# Allegro board board.brd
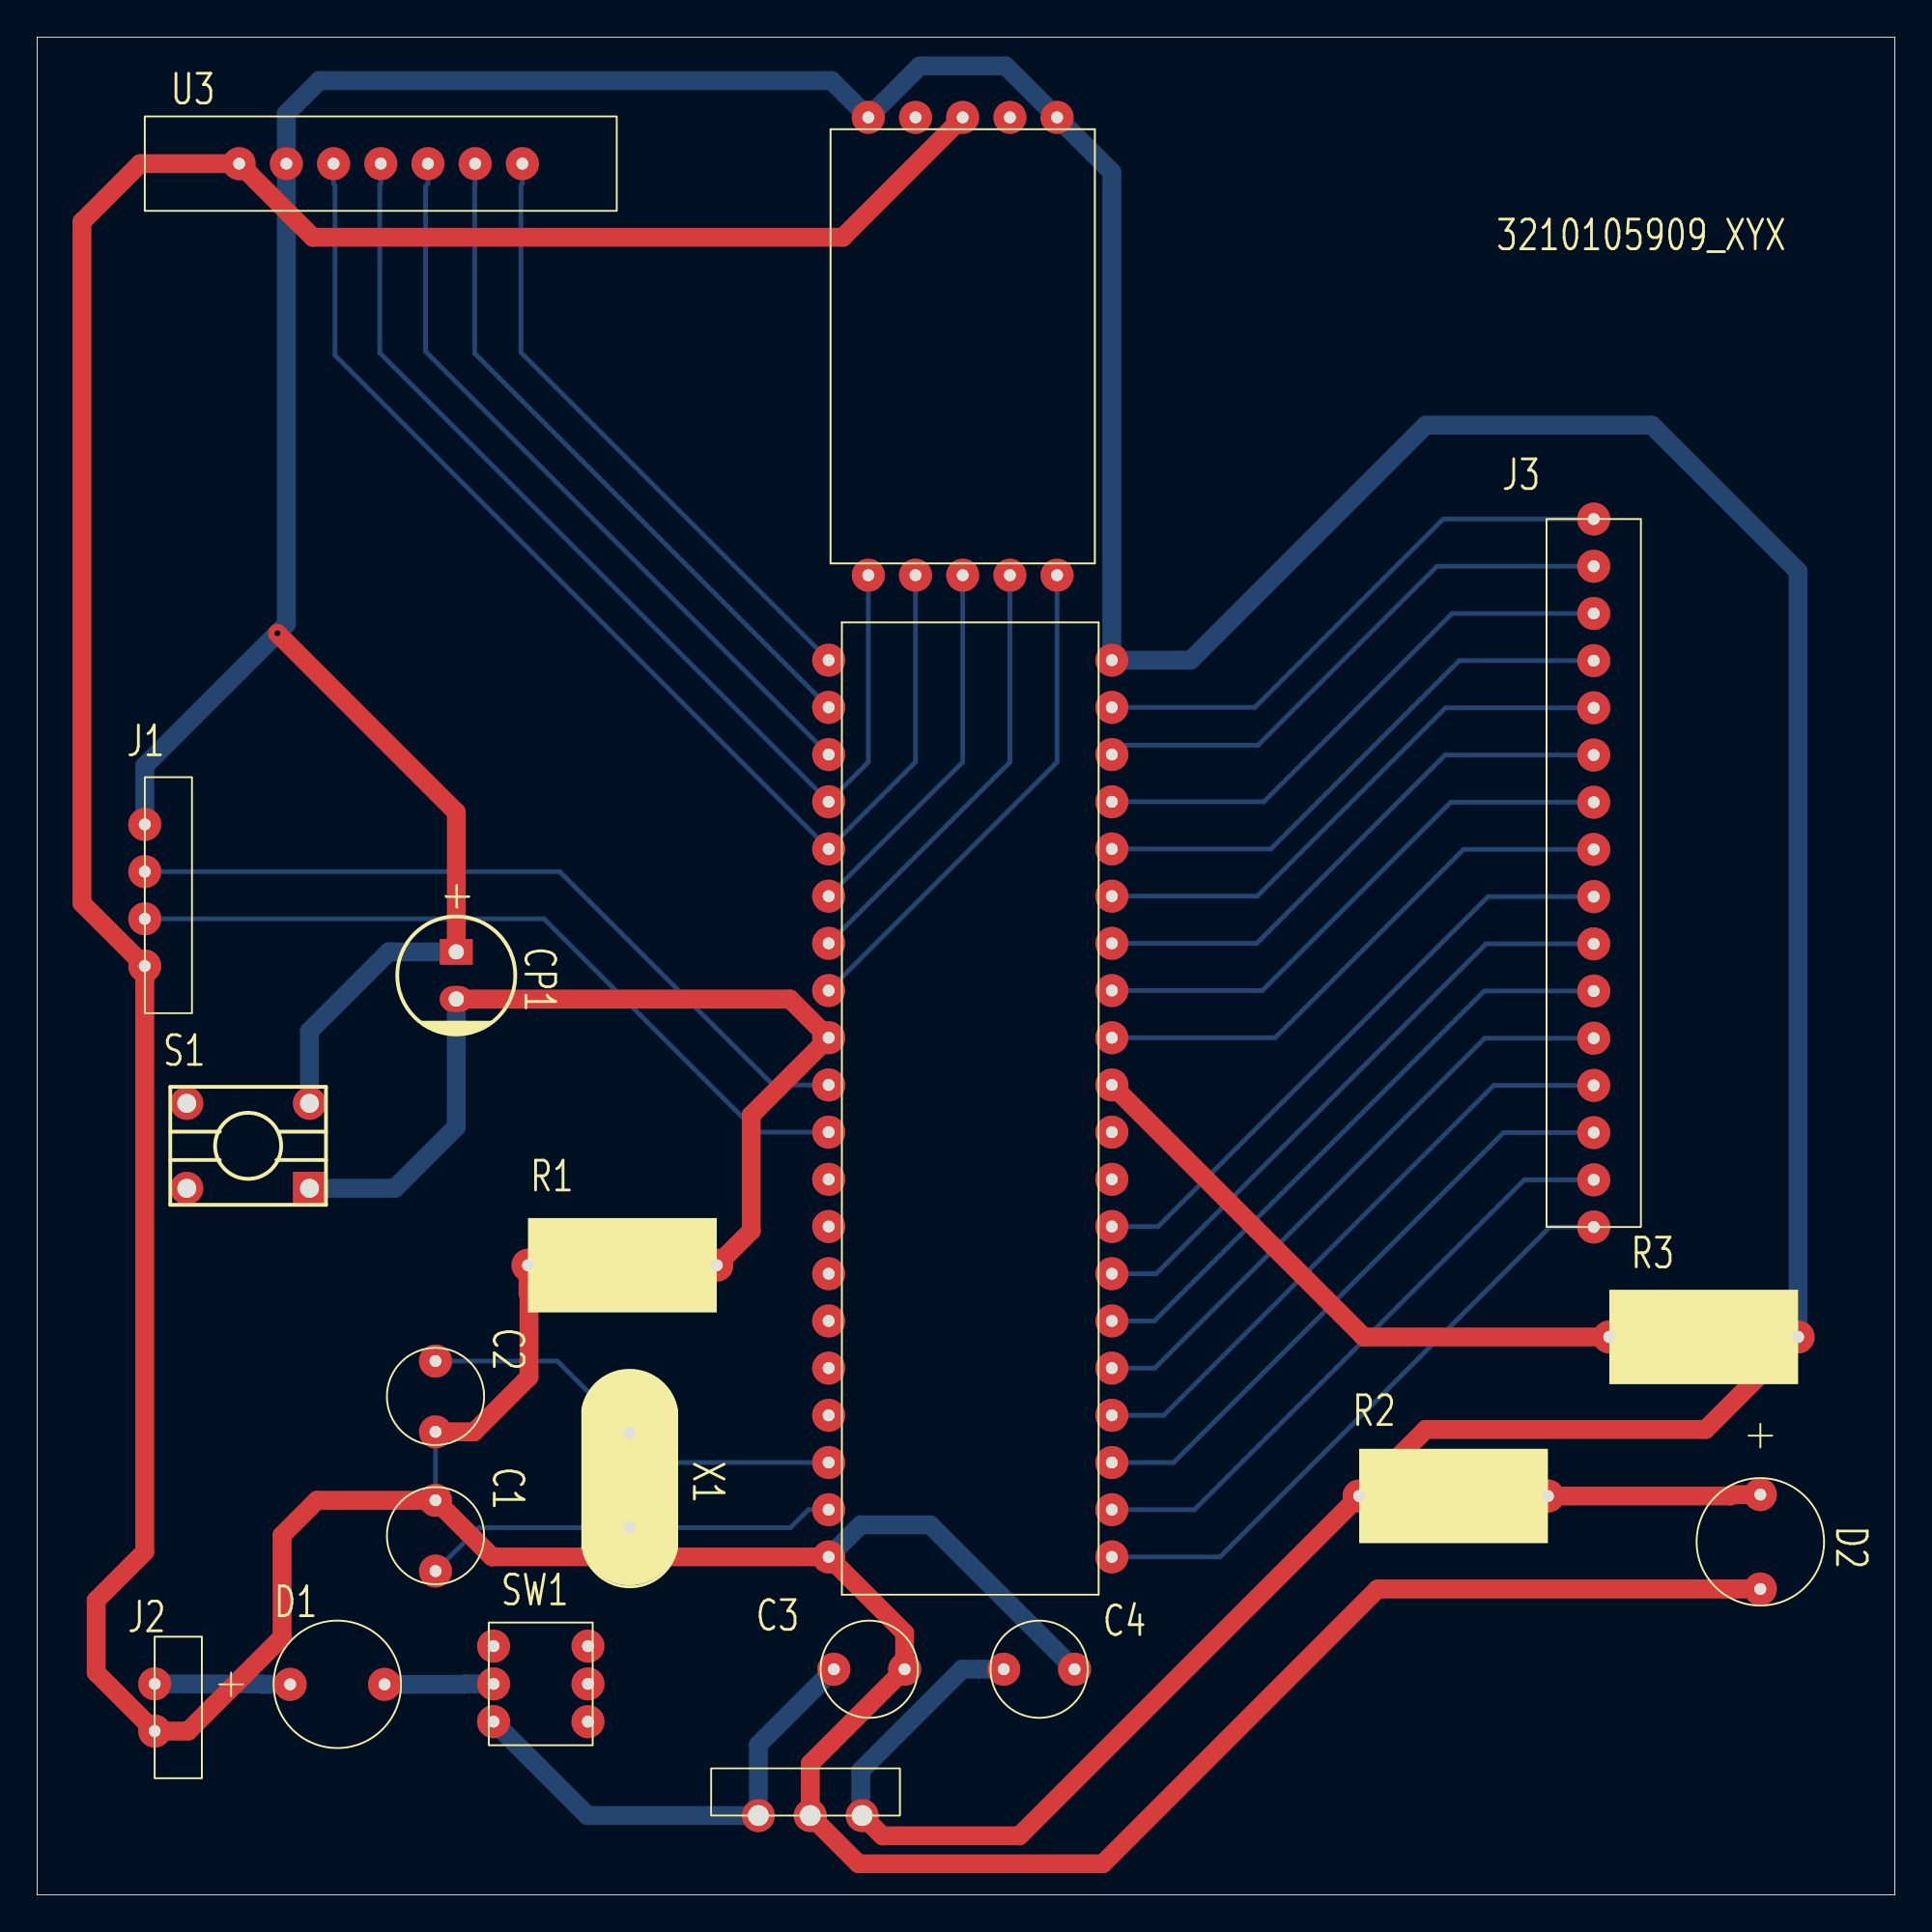
[diagram p0: board, top side]
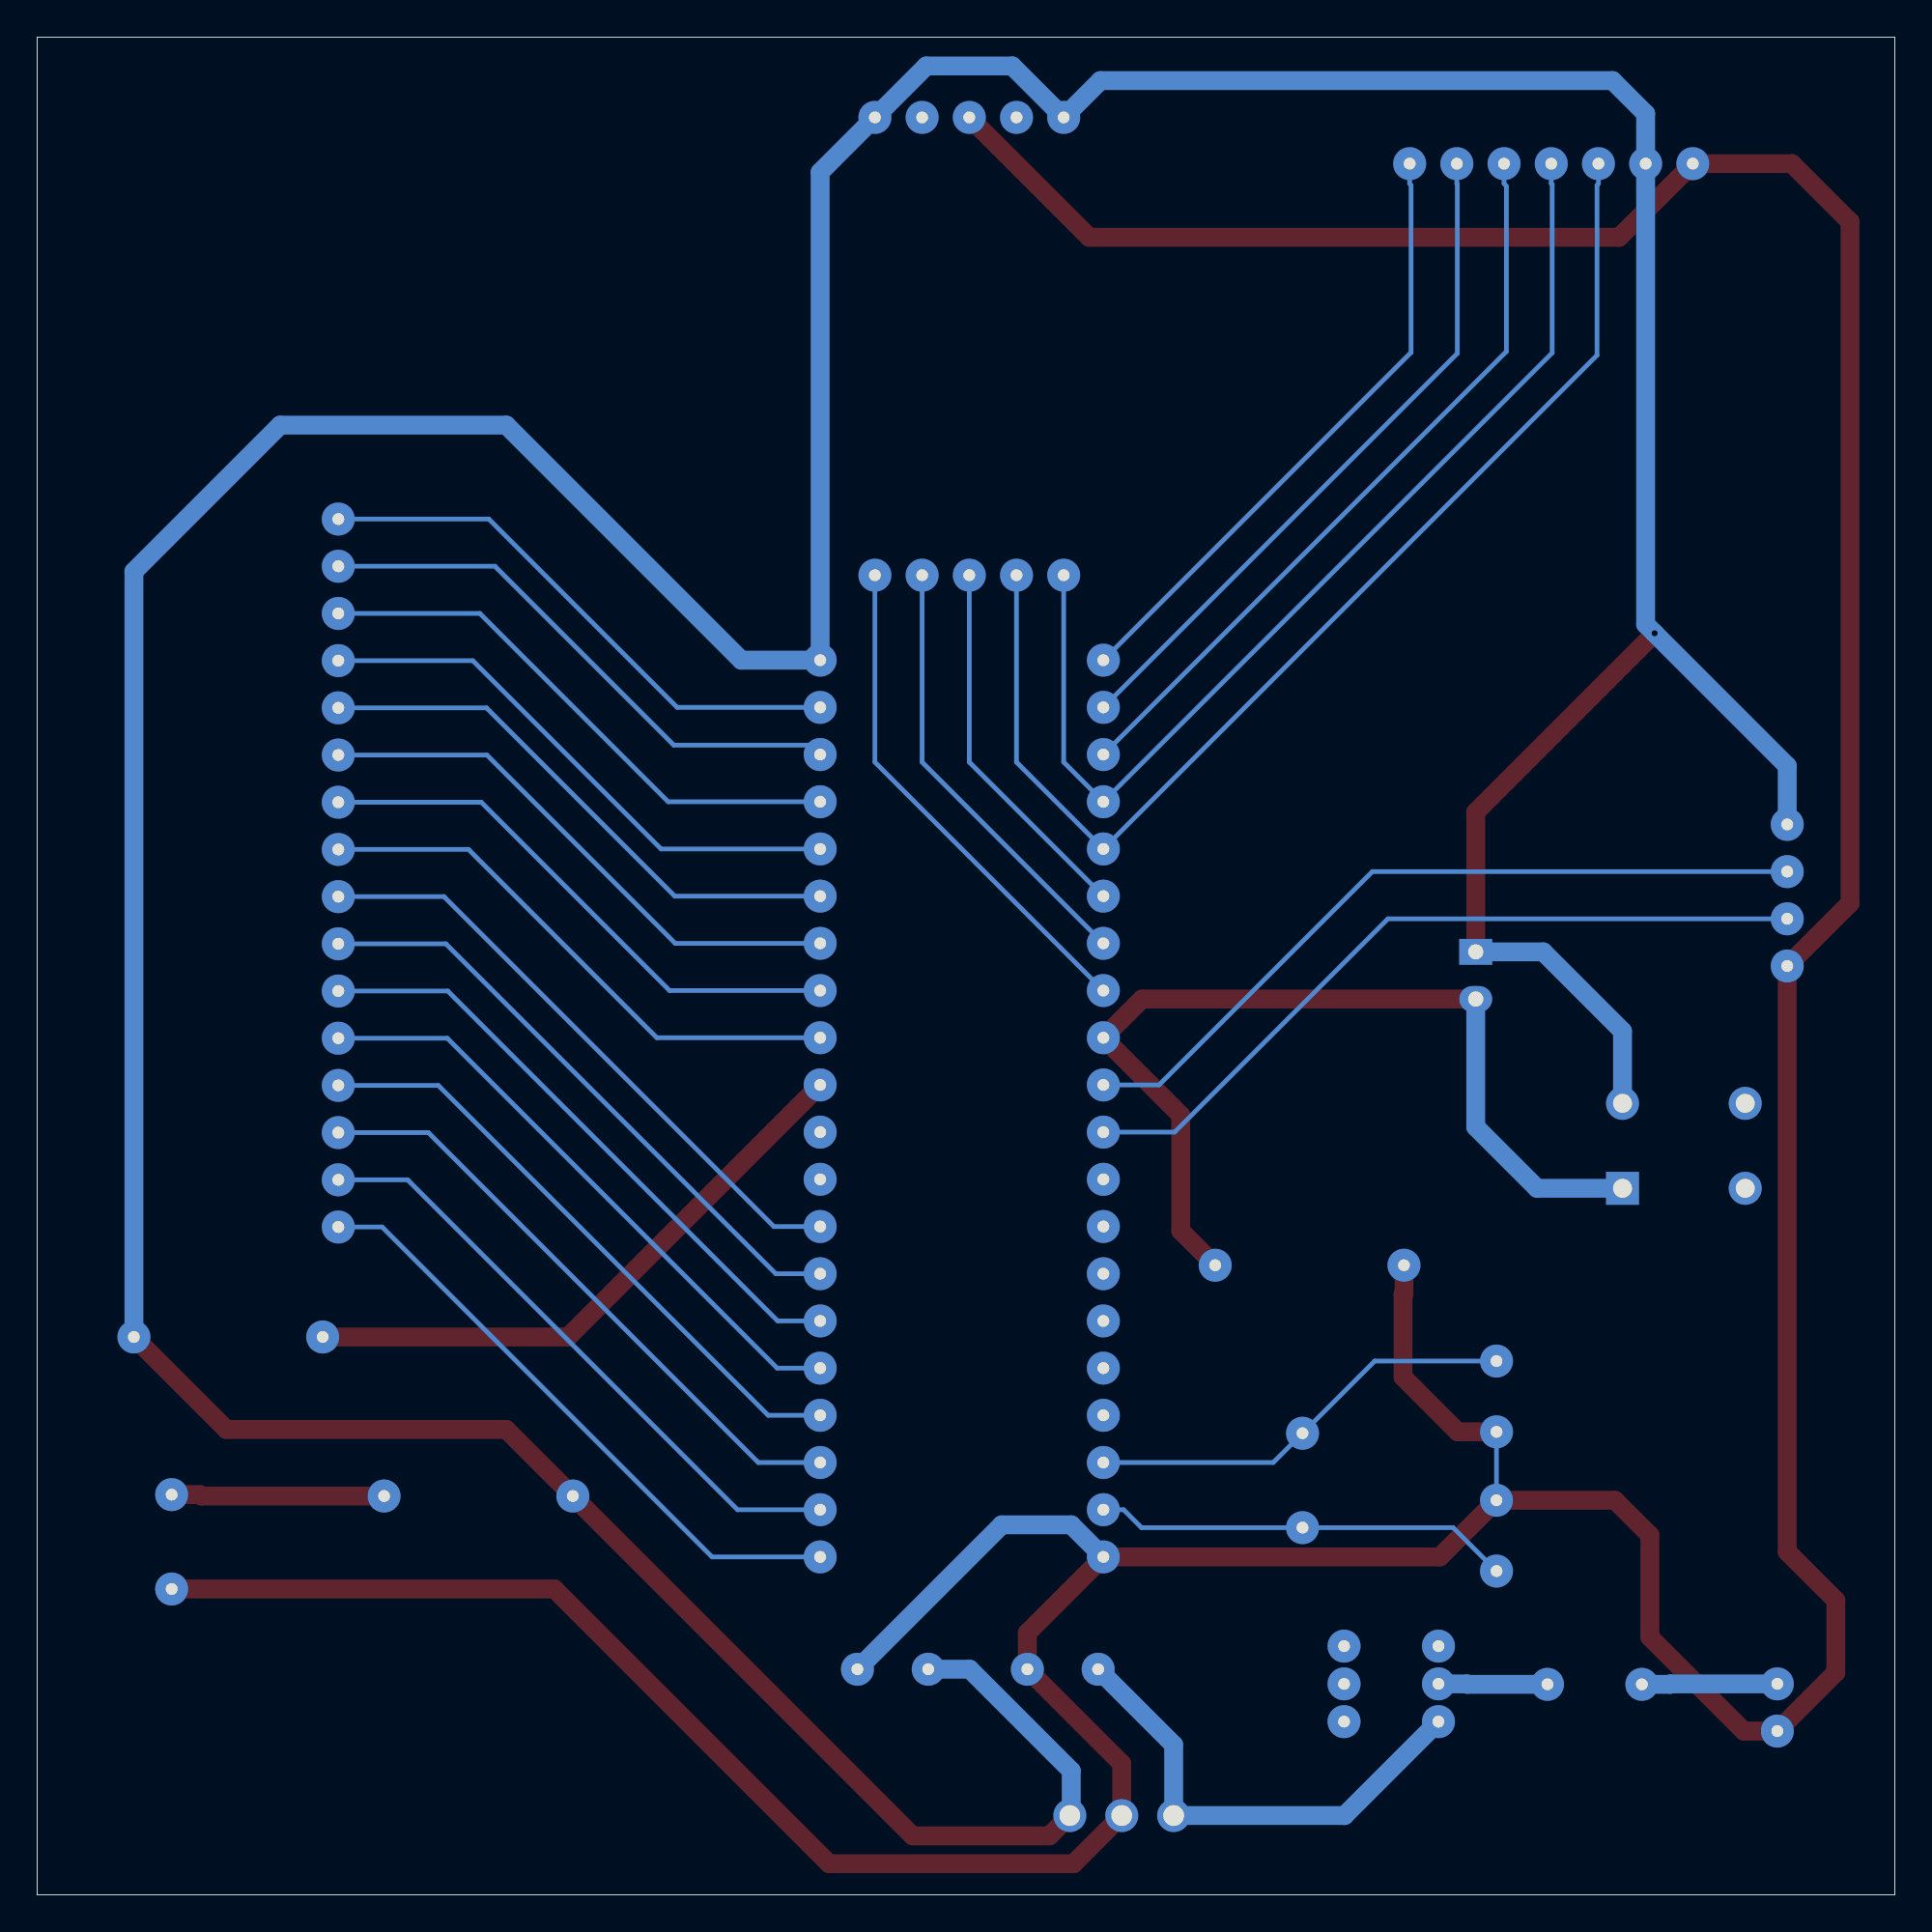
[diagram p1: board, bottom side, seen from below]

Outline 99.97 x 99.97 mm; copper layers: TOP, BOTTOM. Coordinates in mm from the lower left corner of the outline.
Outline path: 0,99.97 99.97,99.97 99.97,0 0,0 0,99.97

## Placement (name value [footprint] x y rotation side)
C1  -  [C]  20.17 21.23 270 top
C2  -  [C]  20.17 28.73 270 top
C3  -  [C]  42.88 10.87 0 top
C4  -  [C]  52.02 10.87 0 top
CP1  -  [CAPC2-100-250]  22.56 49.48 270 top
D1  -  [LED]  13.61 39.27 0 top
D2  -  [LED]  120.68 21.54 270 top
J1  -  [DIP4]  5.79 52.53 0 top
J2  -  [DIP2]  6.32 3.73 0 top
J3  -  [DIP16]  81.23 74.04 0 top
R1  -  [RESISTOR]  21.34 -11.84 0 top
R2  -  [RESISTOR]  66.07 -24.26 0 top
R3  -  [RESISTOR]  79.53 -15.7 0 top
S1  -  [SSW-PUSH-DIP]  14.66 38.02 180 top
SW1  -  [SWITCH-DIP]  13.13 12.12 270 top
U1  -  [DIP-40-100-600]  50.22 42.32 0 top
U2  -  [ADXL345]  49.81 83.34 90 top
U3  -  [OLED]  15.95 72.85 0 top
U13  -  [LM7805]  38.81 4.27 0 top
X1  -  [XTAL-200]  31.88 24.84 270 top

## Library data of the parts
C1 C2 = C: part number: C-30PF
C3 = C: part number: C-0.33UF
C4 = C: part number: C-0.1UF
CP1 = CP: part number: CP-08010022,10UF-100V
D1 = 1N4377: part number: 1N4377-0001,1N4377
D2 = LED: part number: LED-0003,LED
J1 = DIP4: part number: DIP4-0001,4
J2 = DIP2: part number: DIP2-0001,DIP2
J3 = DIP16: part number: DIP16-DIP16
R1 = RESISTOR: part number: RESISTOR-0001,1K
R2 = RESISTOR: part number: RESISTOR-0006,300
R3 = RESISTOR: part number: RESISTOR-0002,4.7K
S1 = RESETKEY: part number: RESETKEY-16100018,RESETKEY-DIP
SW1 = SWITCH: part number: SWITCH-0001,SWITCH
U1 = 89C52: part number: 89C52-0001,STC89C52
U2 = ADXL345: part number: ADXL345-0001,ADXL345
U3 = OLED: part number: OLED-0001,OLED
U13 = LM7805: part number: LM7805-0001,LM7805
X1 = CRYSTAL: part number: CRYSTAL-0002,11.0592MHZ

## Footprints (pads in the part's own frame, mm; a bottom-side part is the same pattern mirrored in y, then rotated)
ADXL345
  round 1.778 hole 0.635: 1(-12.319,5.08) 2(-12.319,2.54) 3(-12.319,0) 4(-12.319,-2.54) 5(-12.319,-5.08) 6(12.319,-5.08) 7(12.319,-2.54) 8(12.319,0) 9(12.319,2.54) 10(12.319,5.08)
C
  round 1.778 hole 0.635: 1(0,1.27) 2(3.81,1.27)
CAPC2-100-250
  rect 1.397x1.778 hole 0.813: 1(-1.27,0)
  oval 1.397x1.778 hole 0.813: 2(1.27,0)
DIP2
  round 1.778 hole 0.635: 1(0,7.62) 2(0,5.08)
DIP4
  round 1.778 hole 0.635: 1(0,5.08) 2(0,2.54) 3(0,0) 4(0,-2.54)
DIP16
  round 1.778 hole 0.635: 1(2.54,0) 2(2.54,-2.54) 3(2.54,-5.08) 4(2.54,-7.62) 5(2.54,-10.16) 6(2.54,-12.7) 7(2.54,-15.24) 8(2.54,-17.78) 9(2.54,-20.32) 10(2.54,-22.86) 11(2.54,-25.4) 12(2.54,-27.94) 13(2.54,-30.48) 14(2.54,-33.02) 15(2.54,-35.56) 16(2.54,-38.1)
DIP-40-100-600
  round 1.778 hole 0.635: 1(-7.62,24.13) 2(-7.62,21.59) 3(-7.62,19.05) 4(-7.62,16.51) 5(-7.62,13.97) 6(-7.62,11.43) 7(-7.62,8.89) 8(-7.62,6.35) 9(-7.62,3.81) 10(-7.62,1.27) 11(-7.62,-1.27) 12(-7.62,-3.81) 13(-7.62,-6.35) 14(-7.62,-8.89) 15(-7.62,-11.43) 16(-7.62,-13.97) 17(-7.62,-16.51) 18(-7.62,-19.05) 19(-7.62,-21.59) 20(-7.62,-24.13) 21(7.62,-24.13) 22(7.62,-21.59) 23(7.62,-19.05) 24(7.62,-16.51) 25(7.62,-13.97) 26(7.62,-11.43) 27(7.62,-8.89) 28(7.62,-6.35) 29(7.62,-3.81) 30(7.62,-1.27) 31(7.62,1.27) 32(7.62,3.81) 33(7.62,6.35) 34(7.62,8.89) 35(7.62,11.43) 36(7.62,13.97) 37(7.62,16.51) 38(7.62,19.05) 39(7.62,21.59) 40(7.62,24.13)
LED
  round 1.778 hole 0.635: 1(0,-27.94) 2(5.08,-27.94)
LM7805
  round 1.778 hole 1.118: 1(0,0) 2(2.794,0) 3(5.588,0)
OLED
  round 1.778 hole 0.635: 1(-5.08,20.32) 2(-2.54,20.32) 3(0,20.32) 4(2.54,20.32) 5(5.08,20.32) 6(7.62,20.32) 7(10.16,20.32)
RESISTOR
  round 1.778 hole 0.635: 1(5.08,45.72) 2(15.24,45.72)
SSW-PUSH-DIP
  rect 1.778x1.778 hole 1.016: 1(0,0)
  round 1.778 hole 1.016: 2(6.604,0) 3(6.604,-4.572) 4(0,-4.572)
SWITCH-DIP
  round 1.778 hole 0.635: 1(-1.27,16.51) 2(0.762,16.51) 3(2.794,16.51) 4(-1.27,11.43) 5(0.762,11.43) 6(2.794,11.43)
XTAL-200
  round 1.778 hole 0.635: 1(0,0) 2(5.08,0)

## Nets
GND: C1.1 C2.2 C3.2 C4.2 D2.2 J1.4(GND) J2.2 R1.1 U1.20(GND) U2.8(GND) U3.1(GND) U13.2(GND)
VCC: C4.1 CP1.1 J1.1(5V) R2.1 R3.2 S1.4(B2) U1.40(VCC) U2.6(CS) U2.10(5V) U3.2(VDD) U13.3(OUTPUT)
VIN: D1.2 SW1.5
ALE: U1.30(ALE/PROG*)
EA: R3.1 U1.31(EA*)
P0.0: J3.1 U1.39(P0.0/AD0)
P0.1: J3.2 U1.38(P0.1/AD1)
P0.2: J3.3 U1.37(P0.2/AD2)
P0.3: J3.4 U1.36(P0.3/AD3)
P0.4: J3.5 U1.35(P0.4/AD4)
P0.5: J3.6 U1.34(P0.5/AD5)
P0.6: J3.7 U1.33(P0.6/AD6)
P0.7: J3.8 U1.32(P0.7/AD7)
P1.0: U1.1(P1.0/T2) U3.7(CS)
P1.1: U1.2(P1.1/T2EX) U3.6(DC)
P1.2: U1.3(P1.2) U3.5(RES)
P1.3: U1.4(P1.3) U2.1(SCL) U3.4(SDA)
P1.4: U1.5(P1.4) U2.2(SDA) U3.3(SCX)
P1.5: U1.6(P1.5) U2.3(SDO)
P1.6: U1.7(P1.6) U2.4(IN2)
P1.7: U1.8(P1.7) U2.5(IN1)
P2.0: J3.16 U1.21(P2.0/A8)
P2.1: J3.15 U1.22(P2.1/A9)
P2.2: J3.14 U1.23(P2.2/A10)
P2.3: J3.13 U1.24(P2.3/A11)
P2.4: J3.12 U1.25(P2.4/A12)
P2.5: J3.11 U1.26(P2.5/A13)
P2.6: J3.10 U1.27(P2.6/A14)
P2.7: J3.9 U1.28(P2.7/A15)
P3.0: J1.2(RXD) U1.10(P3.0/RXD)
P3.1: J1.3(TXD) U1.11(P3.1/TXD)
P3.2: U1.12(P3.2/INT0*)
P3.3: U1.13(P3.3/INT1*)
P3.4: U1.14(P3.4/T0)
P3.5: U1.15(P3.5/T1)
P3.6: U1.16(P3.6/WR*)
P3.7: U1.17(P3.7/RD*)
PSEN: U1.29(PSEN*)
RST: CP1.2 R1.2 S1.1(A1) U1.9(RST)
UNNAMED_1_1N4377_I13_1: D1.1 J2.1
UNNAMED_1_C_I20_1: C3.1 SW1.6 U13.1(INPUT)
UNNAMED_1_LED_I18_1: D2.1 R2.2
XTAL1: C1.2 U1.19(XTAL1) X1.2(A2)
XTAL2: C2.1 U1.18(XTAL2) X1.1(A1)

Pads without a net: S1 2 3; SW1 1 2 3 4; U2 7 9

## Via types
v1: diameter 0.61, hole 0.33, TOP to BOTTOM, 1 via

## Routing (per net, layer and track width the routed paths; a pad name or vN(x,y) marks a point on that pad's centre or on a via; arc(x,y) is an arc through that point)
GND: length 293.1
  TOP w1.016: C2.2 23.52,24.92 26.47,27.86 26.47,32.31 26.42,32.36 R1.1 ; U2.8 43.36,89.2 14.83,89.2 U3.1 5.54,93.17 2.41,90.04 2.41,53.37 J1.4 5.79,18.47 3.18,15.85 3.18,11.96 J2.2 8.13,8.81 13.18,13.87 13.18,19.35 15.06,21.23 C1.1 24.49,18.19 U1.20 46.69,14.1 C3.2 41.61,7.06 U13.2 44.2,1.68 57.35,1.68 72.14,16.46 D2.2
  BOTTOM w0.254: C1.1 C2.2
  BOTTOM w1.016: C4.2 48.06,19.91 44.32,19.91 U1.20
VCC: length 312.8
  TOP w1.016: R3.2 89.79,25.04 74.73,25.04 R2.1 52.86,3.18 45.49,3.18 U13.3 ; CP1.1 22.56,58.27 v1(12.93,67.89)
  BOTTOM w1.016: U13.3 44.32,4.34 44.32,6.68 49.78,12.14 C4.1 ; CP1.1 18.92,50.75 14.66,46.48 S1.4 ; R3.2 94.77,71.22 86.89,79.1 74.73,79.1 62.08,66.45 U1.40 57.84,92.71 U2.6 52.12,98.43 47.5,98.43 U2.10 42.75,97.64 15.19,97.64 13.41,95.86 U3.2 13.41,68.38 v1(12.93,67.89) 5.79,60.76 J1.1
VIN: length 5.9
  BOTTOM w1.016: SW1.5 23.04,11.35 23.01,11.33 D1.2
EA: length 32.4
  TOP w1.016: U1.31 71.4,30.02 R3.1
P0.0: length 30.1
  BOTTOM w0.254: J3.1 75.67,74.04 65.53,63.91 U1.39
P0.1: length 30.3
  BOTTOM w0.254: J3.2 75.34,71.5 65.71,61.87 58.09,61.87 57.84,61.62 U1.38
P0.2: length 30.1
  BOTTOM w0.254: J3.3 76.15,68.96 66.01,58.83 U1.37
P0.3: length 30.1
  BOTTOM w0.254: J3.4 76.53,66.42 66.4,56.29 U1.36
P0.4: length 30.1
  BOTTOM w0.254: J3.5 75.79,63.88 65.66,53.75 U1.35
P0.5: length 30.1
  BOTTOM w0.254: U1.34 65.63,51.21 75.77,61.34 J3.6
P0.6: length 30.1
  BOTTOM w0.254: U1.33 65.94,48.67 76.07,58.8 J3.7
P0.7: length 30.1
  BOTTOM w0.254: U1.32 66.62,46.13 76.76,56.26 J3.8
P1.0: length 33.6
  BOTTOM w0.254: U3.7 26.11,92.1 26.04,92 26.04,83.01 U1.1
P1.1: length 37.2
  BOTTOM w0.254: U3.6 23.57,92.1 23.55,92.05 23.55,82.96 U1.2
P1.2: length 40.8
  BOTTOM w0.254: U3.5 21.03,92.1 20.9,91.95 20.9,83.06 U1.3
P1.3: length 57.4
  BOTTOM w0.254: U3.4 18.49,92.1 18.44,92.05 18.44,82.98 U1.4 44.73,60.96 U2.1
P1.4: length 64.6
  BOTTOM w0.254: U2.2 47.27,60.96 U1.5 16.03,82.85 16.03,92 15.95,92.1 U3.3
P1.5: length 20.3
  BOTTOM w0.254: U2.3 49.81,60.96 U1.6
P1.6: length 23.9
  BOTTOM w0.254: U2.4 52.35,60.96 U1.7
P1.7: length 27.4
  BOTTOM w0.254: U2.5 54.89,60.96 U1.8
P2.0: length 33.3
  BOTTOM w0.254: J3.16 81.41,35.94 63.65,18.19 U1.21
P2.1: length 33.3
  BOTTOM w0.254: J3.15 80.04,38.48 62.28,20.73 U1.22
P2.2: length 33.3
  BOTTOM w0.254: U1.23 61.16,23.27 78.92,41.02 J3.14
P2.3: length 33.3
  BOTTOM w0.254: U1.24 60.63,25.81 78.38,43.56 J3.13
P2.4: length 33.3
  BOTTOM w0.254: U1.25 60.15,28.35 77.9,46.1 J3.12
P2.5: length 33.3
  BOTTOM w0.254: J3.11 77.88,48.64 60.12,30.89 U1.26
P2.6: length 33.3
  BOTTOM w0.254: U1.27 60.22,33.43 77.98,51.18 J3.10
P2.7: length 33.3
  BOTTOM w0.254: J3.9 78.08,53.72 60.33,35.97 U1.28
P3.0: length 41.6
  BOTTOM w0.254: U1.10 39.6,43.59 28.12,55.07 J1.2
P3.1: length 41.6
  BOTTOM w0.254: U1.11 38.76,41.05 27.28,52.53 J1.3
RST: length 51.8
  TOP w1.016: CP1.2 40.51,48.21 U1.9 38.43,41.96 38.43,35.74 R1.2
  BOTTOM w1.016: CP1.2 22.56,41.33 19.25,38.02 S1.1
UNNAMED_1_1N4377_I13_1: length 7.3
  BOTTOM w1.016: D1.1 12.09,11.33 12.07,11.35 J2.1
UNNAMED_1_C_I20_1: length 25.9
  BOTTOM w1.016: SW1.6 29.62,4.27 U13.1 38.81,8.08 C3.1
UNNAMED_1_LED_I18_1: length 11.5
  TOP w1.016: D2.1 91.21,21.54 91.14,21.46 R2.2
XTAL1: length 22.5
  BOTTOM w0.254: U1.19 41.5,20.73 40.54,19.76 X1.2 23.77,19.76 C1.2
XTAL2: length 23.4
  BOTTOM w0.254: U1.18 33.45,23.27 X1.1 27.99,28.73 C2.1

## Text on the board
Ref Des/Silkscreen Top: 3210105909_XYX
DEVICE_TYPE_TOP: FIGURE | SIZE | 13.0 | 25.0 | 32.0 | 40.0 | 44.0 | DRILL CHART: TOP to BOTTOM | ALL UNITS ARE IN MILS | PLATED | QTY | 1 | 105 | 2 | 4 | 3
